# Altium PCB MCXE31B.PcbDoc (part 3 of 3)
Units mil, origin at the board's own origin, x right, y up, seen from the top; angles counter-clockwise.
Board outline 4645.67 x 2165.35 mil, 4 copper layers (TOP, GND, POWER, BOTTOM), stack 60.805 mil thick; 220 components, 156 nets, 796 pads, 319 vias.
Unrouted connection lines stored in the file: 10.
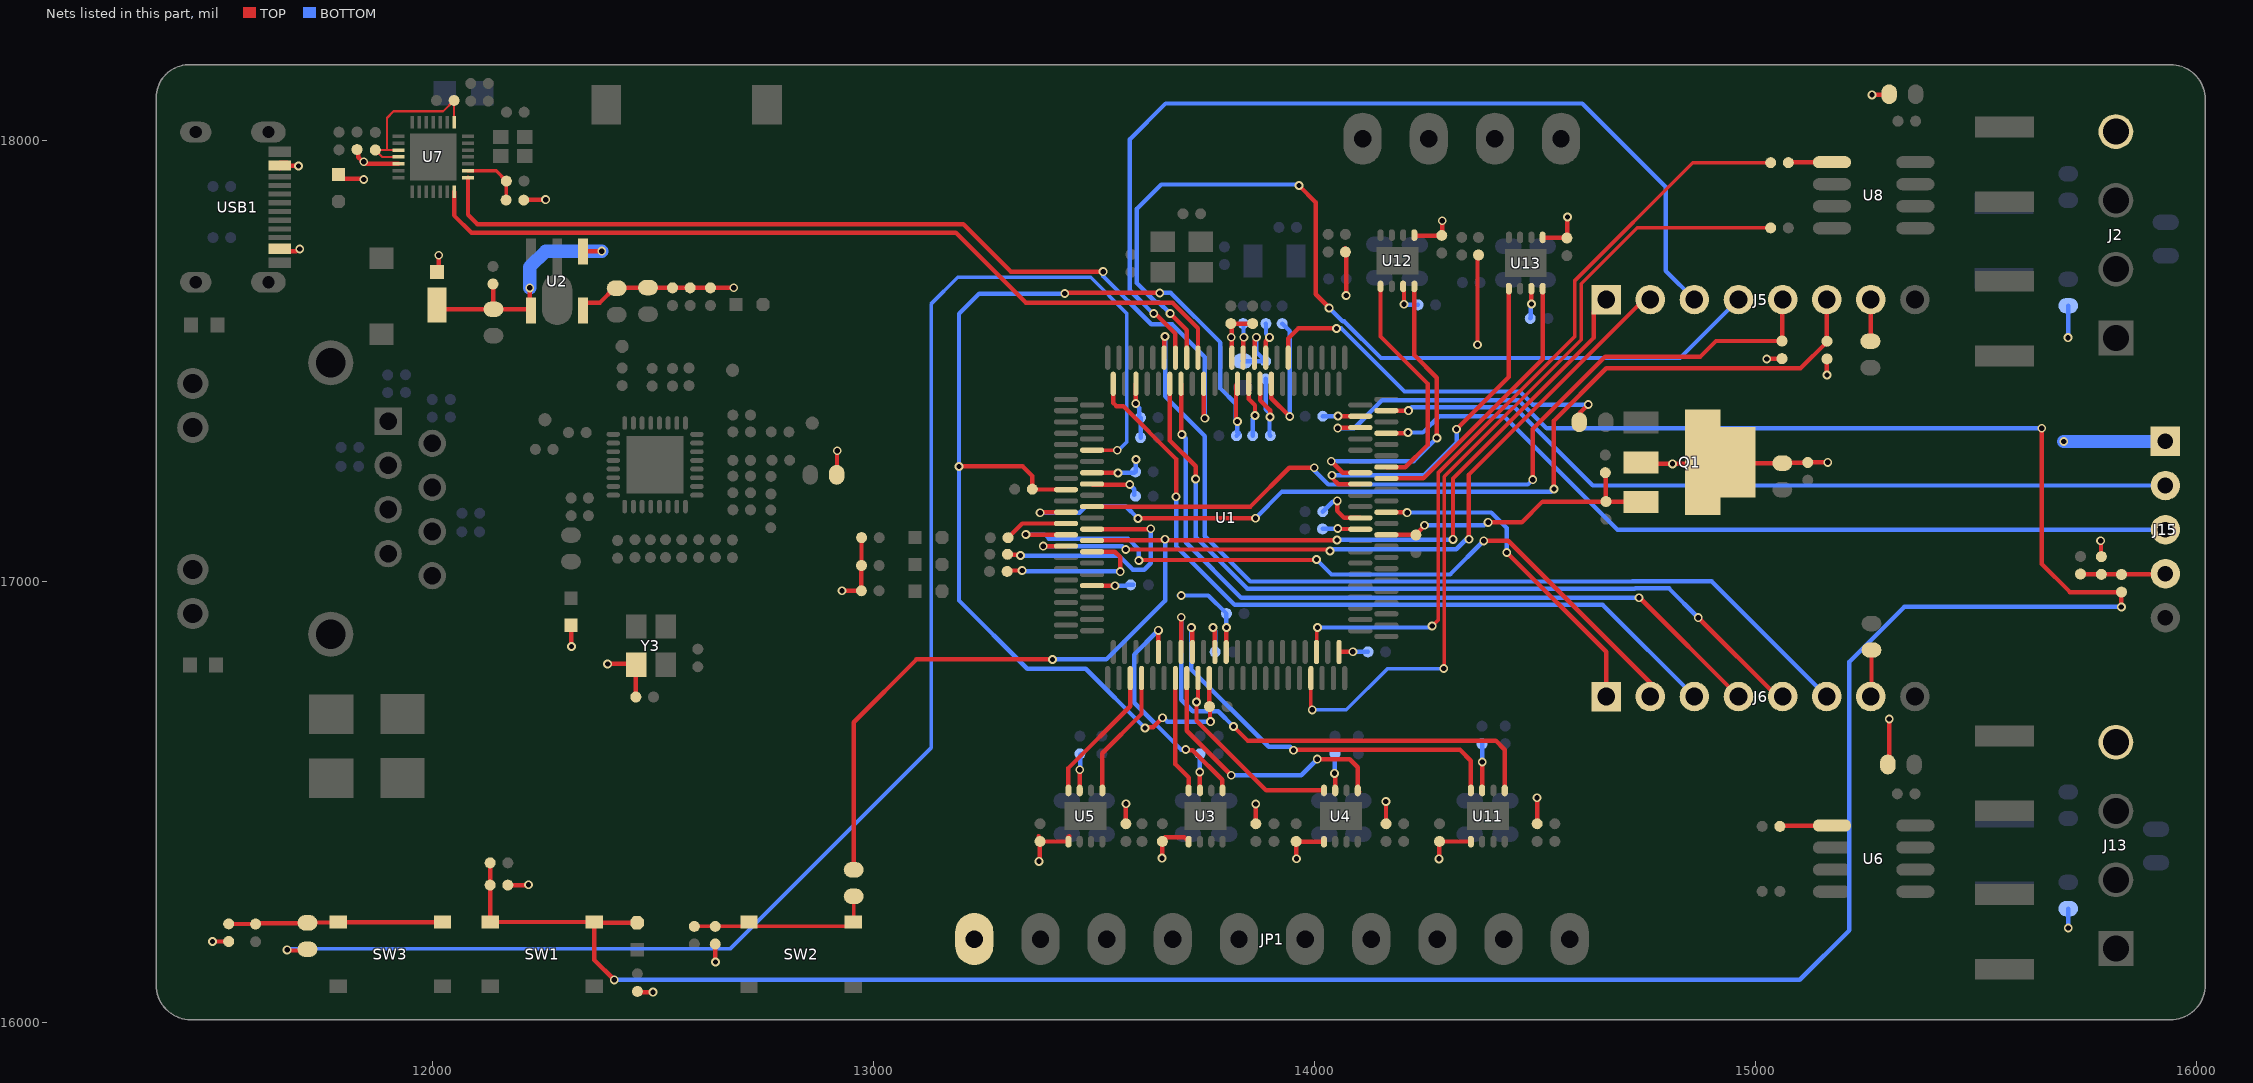
[diagram p5: the nets of this part, all layers, seen from the top]

## Via types
v1: diameter 20, hole 12, TOP to BOTTOM, tented both sides, 319 vias

## Nets (pads, with @x,y where several pads share a name; then routed paths per layer and width w, separated by ;. In a path a pad name is that pad's centre, name@x,y a point inside that pad or via, vN(x,y) a via of type N, cw(c..) or ccw(c..) an arc to the next point about the centre after c; other vN are vias at no path point) (continued)
P3V3: C3.1 C4.1 C15.1 C16.1 C17.1 C18.1 C19.1 C20.1 C21.1 C22.1 C23.1 C24.1 C26.1 C27.1 C33.1 C36.1 C39.1 C44.1 C50.2 C69.1 C72.1 C75.1 C92.1 D4.1 J6.7 J15.1 L3.1 Q1.2 Q1.4 R3.1 R4.2 R6.1 R8.1 R9.2 R10.2 R13.1 R15.2 R16.1 R25.1 R27.1 R35.1 R66.2 R93.1 R99.1 R105.1 R137.1 R138.1 R139.1 R140.1 R145.1 R146.1 R275.1 R281.1 U1.18 U1.38 U1.57 U1.77 U1.108 U1.128 U1.151 U1.169 U2.5 U3.5 U4.5 U5.5 U7.5 U11.5 U12.5 U13.5 Y3.4 | length 4340.5
  TOP w10: v1(11501.9,16184.45) 11501.98,16184.52 11538.48,16184.52 R140.1@11538.55,16184.6 ; D4.1@11787.5,17923.59 11796.88,17914.21 11842.79,17914.21 v1(11844.7,17912.3) ; C50.2@11829.5,17980 11832.37,17977.13 11832.37,17962.49 11839.61,17955.24 11839.61,17952.54 11844.64,17947.51 U7.5@11923.52,17947.51 ; R137.1@12171.3,16312.5 12217,16312.5 v1@12218,16313.5 ; R25.1@12207.5,17865.5 12208,17866 12256.55,17866 v1(12257.05,17866.5) ; L3.1@12314.5,16898.72 12315.02,16898.19 12315.02,16854.03 v1(12315.55,16853.5) ; U2.5@12342.05,17614.9 12342.05,17633.13 12380.38,17633.13 12413.75,17666.5 12488.55,17666.5 C21.1@12489.2,17667.15 12489.45,17666.9 12544.45,17666.9 C3.1@12544.7,17666.65 C26.1@12584.7,17666.65 R3.1@12630.7,17666.65 12630.8,17666.75 12683.6,17666.75 v1(12683.7,17666.85) ; v1(12397.65,16813.95) 12460.56,16813.95 Y3.4@12462.45,16812.06 12461.5,16811.1 C44.1@12461.5,16739 ; R138.1@12465.05,16071.55 12466.83,16069.77 v1(12500.52,16069.77) ; R139.1@12641.6,16178.9 12641.77,16178.73 12641.77,16138.23 v1(12641.95,16138.05) ; R66.2@12916.95,17242.6 12917.6,17243.25 12917.6,17296.5 v1(12918.25,17297.15) ; v1@12928.5,16979.45 v1(12928.85,16979.8) R16.1@12972.95,16979.8 12973.05,16979.9 12973.05,17036.9 R13.1@12973.15,17037 12973.27,17037.12 12973.27,17100.08 R8.1@12973.4,17100.2 ; 13374.44,16423.61 C39.1@13374.67,16423.39 ; v1(13375.8,16366.35) 13376.9,16367.45 13376.9,16410.45 C39.1@13378,16411.55 13378.29,16411.26 13442.03,16411.26 U5.5@13442.32,16410.98 ; U5.5@13442.32,16421.48 U5.5@13444.45,16423.61 ; U1.77@13495.94,16991.46 13496.02,16991.38 13547.67,16991.38 v1(13547.75,16991.3) ; U1.57@13495.94,17247.36 13496.12,17247.18 13553.32,17247.18 v1@13553.5,17247 ; R281.1@13572.6,16451.55 13572.73,16451.67 13572.73,16496.88 v1(13572.85,16497) ; v1(13595,17404.5) 13595.14,17404.64 13595.14,17448.92 U1.38@13595.28,17449.06 ; v1(13654.37,16373.67) 13654.81,16374.11 13654.81,16410.96 13655.4,16411.55 13655.4,16415.52 13661.26,16421.38 13704.72,16421.38 U3.5@13714.97,16411.13 ; U1.108@13800,16840.94 13800.25,16841.19 13800.25,16896.25 v1(13800.5,16896.5) ; U1.18@13851.18,17449.06 13851.18,17414.52 13865.3,17400.4 v1(13865.3,17377.1) ; v1(13866.95,16496.26) 13867.1,16496.12 13867.1,16451.69 R35.1@13867.24,16451.55 ; C36.1@13958.65,16413.2 C36.1@13959.1,16412.75 ; v1(13959.55,16372.4) 13959.1,16372.85 C36.1@13959.1,16412.75 ; U4.5@14021.81,16410.74 U4.5@14021.56,16410.98 13960.87,16410.98 C36.1@13959.1,16412.75 ; v1(14051.9,17183.65) 14051.9,17160.75 14067.65,17145 U1.151@14104.06,17145 ; v1(14053.55,17375.9) 14053.84,17375.6 14103.76,17375.6 U1.169@14104.06,17375.31 ; U1.128@14055.9,16840.94 14056.56,16841.6 v1(14087.15,16841.6) ; R99.1@14070.35,17756.1 14071.9,17754.55 v1(14071.9,17649.05) ; v1(14162,16501.89) 14162.23,16501.66 14162.23,16451.78 R275.1@14162.45,16451.55 ; U12.5@14228.75,17786.86 14228.75,17786.38 14230.5,17784.63 14289.52,17784.63 C72.1@14292.5,17781.65 ; v1(14282.55,16371.95) 14283.02,16372.42 14283.02,16411.08 C69.1@14283.5,16411.55 14283.79,16411.26 14354.44,16411.26 U11.5@14354.73,16410.98 ; C72.1@14288.75,17785.45 14289.75,17786.45 v1(14289.75,17818.7) ; v1(14369.8,17537.45) 14369.8,17735.5 14372,17737.7 R105.1@14372,17741 ; v1(14504.7,16510.65) 14504.85,16510.5 14504.85,16451.7 R93.1@14505,16451.55 ; U13.5@14517.55,17780.91 14518.28,17780.18 14571.62,17780.18 C75.1@14572.35,17779.45 14573.02,17780.12 14573.02,17826.42 v1(14573.7,17827.1) ; Q1.2@14740.5,17271 14744.05,17267.45 v1(14811.85,17267.45) 14876.95,17267.45 Q1.4@14880.5,17271 ; Q1.4@14960.5,17271 14962.4,17269.1 C15.1@15060.95,17269.1 15061.75,17269.9 15117.65,17269.9 C27.1@15118.45,17270.7 15118.6,17270.85 v1(15163.8,17270.85) ; v1(15025.55,17505.1) 15026,17505.55 15059.55,17505.55 R145.1@15060,17506 ; R146.1@15162,17505.5 15162,17469.05 v1(15162.17,17468.88) ; J6.7@15261.5,16740 15263,16741.5 C92.1@15263,16845.5 ; v1(15264.33,18104.08) 15301.58,18104.08 R10.2@15303,18105.5 ; R15.2@15299.75,16586.25 R15.2@15300,16586 15303.4,16589.4 v1(15303.4,16689) ; v1(15782.45,17093.2) 15783.27,17092.38 15783.27,17057.92 R27.1@15784.1,17057.1
  BOTTOM w10: v1(13547.75,16991.3) 13572.75,16991.3 13575.08,16993.63 C18.1@13589.13,16993.63 ; v1@13553.5,17247 v1(13554.5,17247) 13592,17247 C24.1@13594.5,17249.5 13594.98,17249.97 13594.98,17276.97 v1(13595.45,17277.45) ; v1(13595,17404.5) 13595,17401.79 13602.68,17394.11 13602.68,17375.32 C23.1@13605.55,17372.45 13606,17372 C22.1@13606,17326.95 ; v1@13692.75,16968.95 v1(13697.9,16968.95) 13759.55,16968.95 C17.1@13800.5,16928 v1(13800.5,16896.5) ; R6.1@13860.1,17331.35 13860.1,17369.19 13865.3,17374.39 v1(13865.3,17377.1) ; C19.1@14018.9,17159.1 14041.54,17181.74 14049.99,17181.74 v1(14051.9,17183.65) ; C16.1@14019,17375.5 14019.2,17375.7 14053.35,17375.7 v1(14053.55,17375.9) ; v1(14087.15,16841.6) 14121.1,16841.6 C20.1@14121.4,16841.3 ; v1(15708.3,17553.7) 15708.65,17554.05 15708.65,17625.65 R9.2@15709,17626 ; R4.2@15709,16259 15709,16215.25 v1(15709.15,16215.1)
  BOTTOM w30: v1(15698.7,17318.35) J15.1@15929.35,17318.35
  other v1: 12218.2,16313.3 11844.7,17952.54
P5V0: C1.1 C2.1 C34.1 C37.1 C40.1 C70.1 C73.1 C76.1 C93.1 D2.C J2.4 J5.7 J13.4 JP1.10 U2.1 U2.4 U3.3 U4.3 U5.3 U11.3 U12.3 U13.3 | length 1154
  TOP w10: D2.C@12010.2,17627.01 D2.C@12010.89,17627.7 12020.49,17618.1 C1.1@12138.7,17618.1 ; C2.1@12137.55,17675.2 12138.12,17674.62 12138.12,17618.67 C1.1@12138.7,17618.1 ; v1(12221.05,17666.45) U2.4@12221.05,17617.79 ; U2.4@12223.94,17614.9 U2.4@12221.05,17617.79 ; U2.1@12342.05,17748.56 12343.24,17749.75 v1(12384.45,17749.75) ; U5.3@13467.91,16537.63 v1(13467.91,16573.8) ; v1(13740.1,16568.9) 13740.33,16568.67 13740.33,16527.51 U3.3@13741.24,16526.6 ; v1(14045.75,16565.75) 14047.16,16564.35 U4.3@14047.16,16527.12 U4.3@14047.75,16527.72 ; U12.3@14202.88,17670.44 14203.16,17670.72 v1(14203.16,17629.24) ; U11.3@14380.32,16527.12 14380.32,16563.06 14380.41,16563.15 v1(14380.41,16591.57) ; U13.3@14491.96,17664.77 14492.06,17664.68 14492.06,17630.04 v1(14492.15,17629.95) ; C93.1@15260.5,17545.5 15261,17546 15261,17639.5 J5.7@15261.5,17640 ; C1.1@12138.7,17618.1 12220.74,17618.1 U2.4@12221.05,17617.79
  BOTTOM w10: v1(13467.91,16573.8) 13468.91,16574.8 13468.91,16608.46 C40.1@13469.9,16609.45 ; v1(13740.1,16568.9) 13740.33,16569.12 13740.33,16601.17 C34.1@13740.55,16601.4 ; v1(14045.75,16565.75) 14046.2,16566.2 14046.2,16592.95 14046.65,16593.4 ; v1(14203.16,17629.24) 14203.78,17628.62 14234.18,17628.62 C73.1@14234.8,17628 ; C70.1@14379.9,16632.7 14380.15,16632.45 14380.15,16591.83 v1(14380.41,16591.57) ; C76.1@14489.3,17597.2 14490.73,17598.62 14490.73,17628.53 v1(14492.15,17629.95)
  BOTTOM w30: v1(12221.05,17666.45) 12221.05,17713.9 12256.9,17749.75 v1(12384.45,17749.75)
PIN20_V15: C28.1 C29.1 C30.1 C31.1 C32.1 Q1.3 R14.2 U1.20 U1.60 U1.105 U1.148 | length 3389.5
  TOP w10: v1(13194.15,17261.65) 13338.85,17261.65 13360.45,17240.05 C31.1@13360.45,17210.1 13361.22,17209.33 13436.47,17209.33 U1.60@13436.81,17208.98 ; v1(13433.85,17653.55) 13435.34,17655.04 v1(13649.26,17655.04) ; v1(13615.75,16668.65) 13617.66,16670.56 13634.31,16670.56 v1(13655.45,16691.7) ; U1.105@13761.61,16781.81 13761.66,16781.77 13761.66,16718.94 13761.7,16718.9 13761.48,16718.67 13763.33,16716.83 13763.33,16684.33 v1(13764.5,16683.15) ; v1(13825.3,17363.55) 13822.15,17366.7 13822.15,17445.62 U1.20@13825.59,17449.06 ; U1.148@14163.19,17106.61 14163.34,17106.46 C30.1@14229.9,17106.46 ; C30.1@14230.05,17106.3 C30.1@14229.9,17106.46 ; v1(14249.6,17128.2) 14249.6,17127.03 14229.9,17107.32 C30.1@14229.9,17106.46 ; v1(14393.85,17134.8) 14470.1,17134.8 14517.3,17182 C32.1@14661,17182 ; R14.2@14659.5,17247.5 14660.25,17246.75 14660.25,17182.75 C32.1@14661,17182 ; Q1.3@14740.5,17181 14739.5,17182 C32.1@14661,17182
  BOTTOM w10: v1(13433.85,17653.55) 13240.1,17653.55 13194.15,17607.6 v1(13194.15,17261.65) 13194.15,16957.65 13348.7,16803.1 13481.3,16803.1 v1(13615.75,16668.65) ; v1(13649.26,17655.04) 13674.25,17655.04 13786.9,17542.39 13786.9,17438.3 13821.5,17403.7 13821.5,17367.35 v1(13825.3,17363.55) 13825.3,17339.7 13828.5,17336.5 C28.1@13823.35,17331.35 ; v1(13655.45,16691.7) 13658.16,16691.7 13666.71,16683.15 v1(13764.5,16683.15) ; v1(14249.6,17128.2) 14384.54,17128.2 14391.14,17134.8 v1(14393.85,17134.8)
PTA2: R24.2 U1.124 | length 1789.7
  TOP w8: U1.124@14004.72,16840.94 14005.45,16841.67 14005.45,16894.95 v1(14007,16896.5) ; v1(14266.95,16899.85) 14280.25,16913.15 14280.25,17246.79 14590.65,17557.19 14590.65,17683.25 14857.7,17950.3 R24.2@15034.45,17950.3
  BOTTOM w8: v1(14007,16896.5) 14263.6,16896.5 v1(14266.95,16899.85)
PTA3: R23.2 U1.123 | length 1886
  TOP w8: v1@13991.93,16716.27 U1.123@13991.93,16781.81 ; v1(14293.4,16803.45) 14294.25,16804.3 14294.25,17238.75 14604.65,17549.15 14604.65,17675.55 14731.6,17802.5 R23.2@15034.45,17802.5
  BOTTOM w8: v1(13995.2,16709.75) 14072.2,16709.75 14165.9,16803.45 v1(14293.4,16803.45)
PTA4: J15.2 U1.170 | length 1842.8
  TOP w10: U1.170@14163.19,17388.11 v1@14213.08,17388.13
  BOTTOM w10: v1(14213.1,17388.15) 14220.7,17395.75 14453.65,17395.75 14631.05,17218.35 J15.2@15929.35,17218.35
PTA5: C89.1 D13.2 R42.1 R137.2 SW1.3 SW1.4 U1.167 | length 7000.9
  TOP w10: R137.2@12131.3,16312.5 C89.1@12131.3,16362.9 ; R137.2@12131.95,16323.4 12131.95,16229.43 SW1.4@12131.34,16228.83 SW1.3@12367.57,16228.83 ; v1(12412.5,16097.65) 12367.57,16142.58 SW1.3@12367.57,16228.83 ; D13.2@12464.55,16227.14 12369.26,16227.14 SW1.3@12367.57,16228.83 ; v1(14053,17348.5) 14053.87,17349.37 U1.167@14103.71,17349.37 ; v1(15649.05,17348.25) 15649.05,17040.5 15712.8,16976.75 R42.1@15829.7,16976.75 15829.62,16976.67 15829.62,16943.17 v1(15829.55,16943.1)
  BOTTOM w10: v1(12412.5,16097.65) 15100.4,16097.65 15212.95,16210.2 15212.95,16819 15337.05,16943.1 v1(15829.55,16943.1) ; v1(14053,17348.5) 14090.1,17348.5 14153.35,17411.75 14462.85,17411.75 14526.35,17348.25 v1(15649.05,17348.25)
PTA5/RESET_B-MCU-LINK: C55.1 J15.4 R27.2 R42.2 | length 195.6
  TOP w10: C55.1@15736.9,17017.65 15737.17,17017.38 15783.83,17017.38 R27.2@15784.1,17017.1 15784.27,17016.92 15829.52,17016.92 R42.2@15829.7,17016.75 15830.5,17017.55 15928.55,17017.55 J15.4@15929.35,17018.35
  BOTTOM w10: J15.4@15927.83,17016.83 J15.4@15929.35,17018.35
PTA6: U1.102 U11.4 | length 928.1
  TOP w10: v1(13721,16896.5) 13722.88,16894.62 13722.88,16841.29 U1.102@13723.23,16840.94 ; v1(13952.7,16618.35) 13953.4,16619.05 14330.05,16619.05 14354.73,16594.37 U11.4@14354.73,16527.12
  BOTTOM w10: v1(13721,16896.5) 13721,16801.15 13896.3,16625.85 13944.9,16625.85
PTA7: U1.100 U11.1 | length 1143.4
  TOP w10: U1.100@13697.64,16840.94 13697.77,16841.08 13697.77,16919.57 v1(13697.9,16919.7) ; v1@13811.8,16672.65 v1@13816.5,16672.65 ; v1(13816.5,16672) 13848.4,16640.1 14410.85,16640.1 14431.5,16619.45 U11.1@14431.5,16527.12
  BOTTOM w10: v1(13697.9,16919.7) 13697.9,16732.75 13723.9,16706.75 13781.75,16706.75 v1(13816.5,16672)
PTA11: U1.160 U12.1 | length 518.2
  TOP w10: U12.1@14149.9,17669.81 14149.9,17556.3 14256.65,17449.55 14256.65,17310.31 14206.15,17259.81 14163.53,17259.81 U1.160@14163.19,17260.16
PTA12: U1.159 U12.4 | length 703
  TOP w10: v1(14038.15,17273.25) 14064.22,17247.18 14103.88,17247.18 U1.159@14104.06,17247.36 ; U12.4@14226.67,17669.81 14226.67,17513.73 14277.65,17462.75 v1(14277.65,17326.1)
  BOTTOM w10: v1(14038.15,17273.25) 14224.8,17273.25 v1(14277.65,17326.1)
PTA14: J6.1 U1.152 | length 763.5
  TOP w10: U1.152@14163.19,17157.8 14163.53,17157.45 14209.7,17157.45 v1(14210.2,17156.95) ; v1(14436.2,17066.65) 14661.5,16841.35 J6.1@14661.5,16740
  BOTTOM w10: v1(14210.2,17156.95) 14210.45,17157.2 14401.15,17157.2 14436.2,17122.15 v1(14436.2,17066.65)
PTA24: R155.2 U1.14 | length 309.3
  TOP w10: U1.14@13902.36,17449.06 13902.36,17416.39 v1(13944,17374.75)
  BOTTOM w10: R155.2@13927,17585.5 13944,17568.5 v1(13944,17374.75)
PTA25: R156.2 U1.15 | length 84.4
  TOP w10: U1.15@13889.57,17508.19 13889.92,17508.53 13889.92,17545.92 v1(13898.3,17554.3)
  BOTTOM w10: R156.2@13890,17585.5 13890.17,17585.33 13890.17,17562.42 v1(13898.3,17554.3)
PTA28: J6.4 U1.30 | length 1761.9
  TOP w10: U1.30@13697.64,17449.06 13697.64,17335.71 v1(13699.5,17333.85) ; v1(14735.75,16964.1) 14737.4,16964.1 J6.4@14961.5,16740
  BOTTOM w10: v1(13699.5,17333.85) 13708.1,17325.25 13708.1,17089.7 13833.7,16964.1 v1(14735.75,16964.1)
PTA29: J6.5 U1.32 | length 1852.5
  TOP w10: U1.32@13672.02,17449.03 13672.02,17320.53 13730.7,17261.85 v1(13730.7,17233.1) ; v1(14870.35,16918.85) 15049.2,16740 J6.5@15061.5,16740
  BOTTOM w10: v1(13730.7,17233.1) 13730.7,17101.77 13847.72,16984.75 14726.7,16984.75 14727.05,16985.1 14804.1,16985.1 v1(14870.35,16918.85)
PTA30: J6.6 U1.33 | length 2099.5
  TOP w10: U1.33@13659.25,17508.19 13659.6,17508.53 13659.6,17554.3 v1(13661.4,17556.1)
  BOTTOM w10: v1(13661.4,17556.1) 13661.4,17420.6 13751.7,17330.3 13751.7,17103.4 13854.35,17000.75 14720.07,17000.75 14720.42,17001.1 14900.4,17001.1 J6.6@15161.5,16740
PTB18: J6.3 U1.42 | length 1752.5
  TOP w10: U1.42@13544.09,17449.06 13544.09,17405.51 13551.1,17398.5 13566.4,17398.5 13686.3,17278.6 v1(13686.3,17193.1)
  BOTTOM w10: v1(13686.3,17193.1) 13686.3,17080.85 13819.05,16948.1 14653.4,16948.1 J6.3@14861.5,16740
PTB22: R143.2 U1.67 | length 558.2
  TOP w10: R143.2@13304.15,17062.5 13305.58,17061.06 13332.15,17061.06 v1(13333.58,17059.63) ; U1.67@13495.94,17119.41 13496.29,17119.06 13627.71,17119.06 v1(13629.15,17120.5)
  BOTTOM w10: v1(13333.58,17059.63) 13556.22,17059.63 13588.6,17027.25 13614.5,17027.25 13629.15,17041.9 v1(13629.15,17120.5)
PTB23: J5.1 R174.1 U1.69 | length 2800.9
  TOP w10: R174.1@12955.4,16347.1 12955.4,16681.75 13097.75,16824.1 v1(13406.2,16824.1) ; U1.69@13495.94,17093.82 13496.52,17094.4 13661.45,17094.4 14050.75,17094.4 v1(14051.35,17095) ; v1(14314.25,17096.35) 14314.25,17234.3 14633,17553.05 14633,17611.5 J5.1@14661.5,17640
  BOTTOM w10: v1(13406.2,16824.1) 13528.25,16824.1 13661.45,16957.3 v1(13661.45,17096.5) ; v1(14051.35,17095) 14312.9,17095 v1(14314.25,17096.35)
PTB23/WKPU40: C90.1 R139.2 R174.2 SW2.3 SW2.4 | length 428.4
  TOP w8: C90.1@12594.1,16218.9 R139.2@12641.6,16218.9 12953.49,16218.9 12954.42,16219.83 12955.4,16220.82 R174.2@12955.4,16287.1
PTB24: J5.2 U1.70 | length 1755.4
  TOP w10: v1@13384.55,17080.2 v1(13385.37,17081.02) U1.70@13436.81,17081.02 ; v1(13572.4,17073.4) 14029.25,17073.4 14032.84,17069.8 v1(14035.55,17069.8) ; v1(14350.35,17096.75) 14350.35,17243.2 14747.15,17640 J5.2@14761.5,17640
  BOTTOM w10: v1(13385.37,17081.02) 13564.78,17081.02 v1(13572.4,17073.4) ; v1(14035.55,17069.8) 14039.75,17074 14321.6,17074 14344.35,17096.75 v1(14350.35,17096.75)
PTC4: J15.3 U1.166 | length 1888.7
  TOP w10: U1.166@14163.19,17336.93 14163.53,17337.28 14211.08,17337.28 v1(14212.35,17338.55)
  BOTTOM w10: v1(14212.35,17338.55) 14245.95,17338.55 14282.95,17375.55 14430,17375.55 14687.2,17118.35 J15.3@15929.35,17118.35
PTC14: R144.2 U1.71 | length 359.9
  TOP w10: R144.2@13303.4,17023.75 13305.4,17025.75 v1(13337.4,17025.75) ; U1.71@13495.94,17068.23 13547.62,17068.23 13559.65,17056.2 v1(13559.65,17023.15)
  BOTTOM w10: v1(13337.4,17025.75) 13338.7,17024.45 13558.35,17024.45 v1(13559.65,17023.15)
PTC15: J6.2 U1.68 | length 1763.5
  TOP w10: v1(13345.85,17107.15) 13346.12,17106.88 13436.54,17106.88 U1.68@13436.81,17106.61 ; v1(13601.95,17048.25) 13603.25,17049.55 14003.25,17049.55 v1(14004.55,17050.85) ; v1(14383.85,17092.95) 14439.6,17092.95 14769.15,16763.4 14769.15,16747.65 J6.2@14761.5,16740
  BOTTOM w10: v1(13345.85,17107.15) 13388.94,17107.15 13398.02,17098.06 13577.44,17098.06 13601.95,17073.55 v1(13601.95,17048.25) ; v1(14004.55,17050.85) 14038.65,17016.75 14307.65,17016.75 v1(14383.85,17092.95)
PTC16: R141.2 U1.66 | length 144.8
  TOP w10: R141.2@13305.35,17100.05 13337.5,17132.2 U1.66@13436.81,17132.2
PTC26: U1.91 U5.4 | length 302.2
  TOP w10: U5.4@13442.32,16537.63 13442.32,16577.91 13582.48,16718.07 U1.91@13582.48,16781.81
PTC27: U1.93 U5.1 | length 281
  TOP w10: U5.1@13519.09,16537.63 13519.09,16611.39 13608.07,16700.37 U1.93@13608.07,16781.81
PTC28: U1.96 U3.1 | length 532.1
  TOP w10: v1(13646.2,16890) 13646.33,16889.87 13646.33,16841.08 U1.96@13646.46,16840.94 ; v1(13708.2,16619.7) 13710.11,16617.79 13724.44,16617.79 13791.02,16551.21 13791.02,16528 U3.1@13791.74,16527.28
  BOTTOM w10: v1(13646.2,16890) 13591.35,16835.15 13591.35,16726.1 13697.75,16619.7 v1(13708.2,16619.7)
PTC29: U1.99 U3.4 | length 267
  TOP w10: U1.99@13684.84,16781.81 13684.84,16586.41 13714.97,16556.28 U3.4@13714.97,16527.28
PTC30: U1.101 U4.1 | length 628.5
  TOP w10: U1.101@13710.43,16781.81 13710.43,16662.52 v1(13811.3,16561.65) ; v1(14006.5,16598.05) 14079.85,16598.05 14098.34,16579.56 U4.1@14098.34,16527.12 14101.2,16524.26 U4.1@14101.4,16524.46
  BOTTOM w10: v1(13811.3,16561.65) 13970.1,16561.65 v1(14006.5,16598.05)
PTC31: U1.103 U4.4 | length 452.4
  TOP w10: U1.103@13736.02,16781.81 13736.02,16733.88 13732.6,16730.46 v1(13732.6,16727.75) 13732.6,16685.35 13890.83,16527.12 U4.4@14021.56,16527.12
PTD5: R218.1 U1.53 | length 3573.1
  TOP w8: v1(11671.05,16165.65) 11672.48,16164.22 11714.27,16164.22 R218.1@11717.05,16167 ; U1.53@13507.49,17299 13507.98,17298.5 v1(13553.08,17298.5)
  BOTTOM w8: v1(11671.05,16165.65) 11674.05,16168.65 12676.15,16168.65 13130.9,16623.4 13130.9,17629.89 13191.55,17690.54 13492.55,17690.54 13575,17608.09 13575,17317.72 13555.78,17298.5 v1(13553.08,17298.5)
PTD5/EIRQ13: C88.1 R140.2 R218.2 SW3.3 SW3.4 | length 486.6
  TOP w10: R140.2@11538.55,16224.6 11538.8,16224.35 11599.3,16224.35 C88.1@11599.55,16224.1 11601,16225.55 11715.6,16225.55 R218.2@11717.05,16227 11717.67,16227.61 11786.38,16227.61 11787,16228.23 SW3.3@12023.22,16228.23
PTD8: J5.6 R146.2 U1.64 | length 2213.4
  TOP w10: v1(13378.15,17156.75) 13378.85,17157.45 13436.47,17157.45 U1.64@13436.81,17157.8 ; v1(13599.85,17143.7) 13600.13,17143.98 13865.93,17143.98 v1(13866.21,17144.26) ; v1(14543,17210.35) 14543,17365.4 14661.7,17484.1 15102.1,17484.1 15162,17544 R146.2@15162,17545.5 15161.75,17545.75 15161.75,17639.75 J5.6@15161.5,17640
  BOTTOM w10: v1(13378.15,17156.75) 13467.45,17156.75 13482.15,17171.45 13572.1,17171.45 v1(13599.85,17143.7) ; v1(13866.21,17144.26) 13926.6,17204.65 14537.3,17204.65 v1(14543,17210.35)
PTD9: J5.5 R145.2 U1.63 | length 1916.8
  TOP w10: U1.63@13495.98,17170.62 13855.02,17170.62 13943.25,17258.85 v1(13999.45,17258.85) ; v1(14495.1,17231.7) 14495.1,17346.6 14659.3,17510.8 14875.2,17510.8 14910.4,17546 R145.2@15060,17546 15060.75,17546.75 15060.75,17639.25 J5.5@15061.5,17640
  BOTTOM w10: v1(13999.45,17258.85) 13999.45,17252.55 14031.35,17220.65 14484.05,17220.65 v1(14495.1,17231.7)
PTD17: J5.3 U1.31 | length 2149.3
  TOP w10: v1@13637.26,17610.01 13684.84,17562.42 U1.31@13684.84,17508.19
  BOTTOM w10: v1(13635.6,17608.35) 13634.12,17608.35 13581.15,17661.32 13581.15,18003.1 13662.51,18084.46 14607.34,18084.46 14796.55,17895.25 14796.55,17704.95 J5.3@14861.5,17640
PTE3: U1.27 U7.14 | length 1913
  TOP w10: U7.14@12049.5,17884.52 12049.5,17830.75 12089.05,17791.2 13187.25,17791.2 13345.9,17632.55 13678.45,17632.55 13736.02,17574.98 U1.27@13736.02,17508.19
PTE12: J5.4 U1.29 | length 2117.8
  TOP w10: v1@13672.92,17611.08 v1@13674.3,17609.7 ; v1(13672.95,17608.35) 13710.43,17570.87 U1.29@13710.43,17508.19 ; v1(13964.9,17898.65) 14003.3,17860.25 14003.3,17651.8 14033.4,17621.7 v1(14033.4,17620.85)
  BOTTOM w10: v1(13672.95,17608.35) 13647.26,17634.04 13640.56,17634.04 13597.15,17677.45 13597.15,17845.42 13652.49,17900.76 13962.79,17900.76 v1(13964.9,17898.65) ; v1(14033.4,17620.85) 14033.65,17620.85 14064,17590.5 14067.85,17590.5 14150.95,17507.4 14828.9,17507.4 J5.4@14961.5,17640
PTE13: R12.1 U1.11 | length 852.9
  TOP w10: U1.11@13940.75,17508.19 13940.75,17551.8 13963.45,17574.5 v1(14050.3,17574.5) ; R12.1@14600.5,17362 14603.12,17364.62 14603.12,17384.27 v1(14620.8,17401.95)
  BOTTOM w10: v1(14050.3,17574.5) 14061.22,17574.5 14204.27,17431.45 14465.78,17431.45 14495.28,17401.95 v1(14620.8,17401.95)
PTE14: U1.26 U7.15 | length 2112.1
  TOP w10: U7.15@12081,17916.02 12081,17832.4 12102.25,17811.15 13203.9,17811.15 13311.7,17703.35 v1(13520.95,17703.35) ; U1.26@13748.82,17449.06 13748.82,17373.68 v1(13751.65,17370.85)
  BOTTOM w10: v1(13520.95,17703.35) 13520.95,17693.3 13630.2,17584.05 13677.3,17584.05 13751.65,17509.7 v1(13751.65,17370.85)
PTE24: U1.157 U13.1 | length 787.7
  TOP w10: v1(14040.05,17241.65) 14040.05,17235.3 14053.92,17221.42 14103.71,17221.42 U1.157@14104.06,17221.77 ; v1(14322.35,17346.05) 14440.78,17464.48 U13.1@14440.78,17664.77
  BOTTOM w10: v1(14040.05,17241.65) 14248.85,17241.65 14322.35,17315.15 v1(14322.35,17346.05)
PTE25: U1.158 U13.4 | length 626
  TOP w10: U1.158@14163.19,17234.57 14246.82,17234.57 14517.55,17505.3 U13.4@14517.55,17664.77
RST: C49.2 R25.2 U7.16 | length 139.6
  TOP w8: U7.16@12081,17931.76 12144.74,17931.76 12167.75,17908.75 12167.75,17865.75 R25.2@12167.5,17865.5
RXD_485: R290.1 U6.1 | length 119.1
  TOP w10: R290.1@15055.2,16445.7 15056.1,16446.6 15172.61,16446.6 U6.1@15173.51,16447.5
RXD_485_1: R24.1 U8.1 | length 102.5
  TOP w8: U8.1@15173.51,17951.5 U8.1@15175.58,17953.57
  TOP w10: R24.1@15074.45,17950.3 15075.05,17950.9 15172.91,17950.9 U8.1@15173.51,17951.5
V11_MCU: C10.1 C11.1 C12.1 C13.1 C14.1 U1.21 U1.59 U1.106 U1.149 | length 434.4
  TOP w10: U1.59@13495.94,17221.77 13497.22,17220.5 v1(13581.5,17220.5) ; U1.106@13774.41,16840.94 v1@13774.41,16889.38 ; U1.21@13812.8,17508.19 13812.45,17508.53 13812.45,17554.6 13812.45,17583.55 C12.1@13810.5,17585.5 C14.1@13860,17585.5 ; v1(14053,17121) 14054.24,17119.76 14103.71,17119.76 U1.149@14104.06,17119.41
  BOTTOM w10: v1(13581.5,17220.5) 13591.79,17210.21 C10.1@13591.79,17196.86 ; v1(13770,16896.5) 13770,16893.79 13775,16888.79 C13.1@13775,16841 ; C11.1@14018.45,17120.05 14018.92,17120.53 14052.52,17120.53 v1(14053,17121)
  other v1: 13811.65,17554.6
V25_MCU: C9.1 U1.19 | length 78.7
  TOP w10: U1.19@13838.39,17508.19 13838.74,17508.53 13838.74,17553.24 v1(13840.1,17554.6)
  BOTTOM w10: C9.1@13838.5,17585.5 13839.3,17584.7 13839.3,17555.4 v1(13840.1,17554.6)
VBUS: D2.A USB1.A4 USB1.A9 USB1.B4 USB1.B9 | length 160
  TOP w10: USB1.B4@11653.99,17760.89 USB1.A9@11653.99,17749.07 11654.9,17749.98 11691.87,17749.98 11696.69,17754.8 v1(11699.4,17754.8) ; USB1.B9@11654,17938.05 USB1.A4@11654,17949.86 11670.69,17949.86 11671.6,17948.95 11671.6,17943 v1(11696.6,17943) ; D2.A@12010.89,17702.5 12014.85,17706.46 v1(12014.85,17740.5)
VDD: C43.2 C45.1 U7.3 U7.4 U7.22 | length 402.5
  TOP w5: U7.4@11923.52,17963.3 11886.7,17963.3 C43.2@11871,17979 11897.26,17979 ; U7.3@11923.52,17979 11897.26,17979 ; U7.22@12049.5,18042 C45.1@12049.5,18091.5 12024.7,18066.7 11912.15,18066.7 11897.26,18051.81 11897.26,17979
VREFH_MCU: C25.1 R6.2 U1.16 | length 219.5
  TOP w10: U1.16@13876.77,17449.06 13876.77,17411.56 13899.45,17388.88 v1(13899.45,17373.8)
  BOTTOM w10: C25.1@13889.5,17460 13889.5,17390.9 13897.54,17382.86 13897.54,17375.71 v1@13898.15,17375.1 ; v1(13899.45,17373.8) v1@13898.15,17375.1 ; R6.2@13900.1,17331.35 13898.15,17333.3 v1@13898.15,17375.1
VREFL: C25.2 R11.2 U1.17 | length 163.1
  TOP w10: U1.17@13863.98,17508.19 13864.33,17508.53 13864.33,17547.72 13868.35,17551.74 v1(13868.35,17554.45)
  BOTTOM w10: R11.2@13837.5,17500.5 13837.75,17500.25 C25.2@13889.25,17500.25 ; v1(13868.35,17554.45) 13868.35,17521.15 C25.2@13889.25,17500.25 ; C25.2@13889.5,17500 C25.2@13889.25,17500.25
pads on no net: ANT1.2 J1.7 U1.1 U1.2 U1.3 U1.4 U1.5 U1.6 U1.7 U1.8 U1.9 U1.10 U1.12 U1.13 U1.28 U1.34 U1.35 U1.36 U1.39 U1.40 U1.41 U1.43 U1.44 U1.45 U1.46 U1.52 U1.56 U1.72 U1.73 U1.74 U1.75 U1.76 U1.79 U1.80 U1.81 U1.82 U1.83 U1.84 U1.85 U1.86 U1.87 U1.88 U1.89 U1.90 U1.92 U1.94 U1.95 U1.97 U1.98 U1.104 U1.109 U1.110 U1.111 U1.112 U1.113 U1.114 U1.115 U1.116 U1.117 U1.118 U1.119 U1.122 U1.125 U1.126 U1.129 U1.130 U1.131 U1.132 U1.133 U1.135 U1.136 U1.137 U1.138 U1.139 U1.140 U1.141 U1.142 U1.143 U1.144 U1.145 U1.146 U1.147 U1.153 U1.154 U1.155 U1.156 U1.161 U1.162 U1.163 U1.164 U1.165 U1.171 U2.3 U7.1 U7.2 U7.7 U7.9 U7.10 U7.11 U7.17 U7.23 U7.24 U7.25 U7.26 U7.27 U7.28 U10.4 USB1.A8 USB1.B8

## Polygon pours and split planes (outlines as drawn)
DGND on GND (split plane): 15952.68,18151.4 15998.46,18105.63 15999.63,18099.71 15999.63,18093.94 15999.63,16086.06 15999.63,16080.29 15997.38,16068.96 15993.28,16059.07 15967.98,16033.77 15958.09,16029.67 15946.76,16027.42 11447.02,16027.42 11435.69,16029.67 11428.12,16032.81 11399.55,16061.38 11396.41,16068.96 11394.16,16080.29 11394.16,16086.06 11394.16,18097.24 11394.16,18102.55 11395.97,18111.95 11434.68,18150.65 11441.88,18152.37 11446.75,18152.58 15946.76,18152.58
GND_E on GND (split plane): 11827.05,17401.71 11738.2,17312.85 11737.09,17311.2 11736.7,17309.25 11736.7,17118.05 11737.09,17116.1 11738.2,17114.45 11803.15,17049.5 11804.8,17048.39 11806.75,17048 12062.4,17048 12062.4,16781.55 11670.82,16781.55 11670.85,16781.7 11670.85,17551.75 11827.05,17551.75
P3V3 on POWER (split plane): 15958.09,18150.33 15968.77,18145.91 15978.37,18139.49 15986.54,18131.32 15992.96,18121.71 15997.38,18111.04 15999.63,18099.71 15999.63,18093.94 15999.63,16086.06 15999.63,16080.29 15997.38,16068.96 15992.96,16058.28 15986.54,16048.68 15978.37,16040.51 15968.77,16034.09 15958.09,16029.67 15946.76,16027.42 11447.02,16027.42 11435.69,16029.67 11425.02,16034.09 11415.42,16040.51 11407.25,16048.68 11400.83,16058.29 11396.41,16068.96 11394.16,16080.29 11394.16,16086.06 11394.16,18097.24 11394.16,18102.55 11396.17,18112.97 11400.13,18122.82 11405.88,18131.74 11413.22,18139.4 11421.89,18145.54 11431.56,18149.91 11441.88,18152.37 11446.75,18152.58 15946.76,18152.58
VBUS on POWER (split plane): 11750,18053.24 11750,17858.45 11750.39,17856.5 11751.5,17854.85 11820.05,17786.3 11821.7,17785.19 11823.65,17784.8 12037.14,17784.8 12076.35,17745.59 12076.35,17679.96 12021.84,17625.45 11588.16,17625.45 11551.85,17661.76 11551.85,18049.49 11585.46,18083.1 11720.14,18083.1
EPHY_VDDA on POWER (split plane): 12427.75,17388.29 12427.75,16964.41 12365.39,16902.05 11881.86,16902.05 11733.85,17050.06 11733.85,17389.69 11834.36,17490.2 12325.84,17490.2
PIN20_V15 on POWER (split plane): 14267.9,16825.76 14097.74,16655.6 13718.85,16655.6 13718.85,16709.05 14055.8,16709.05 14057.75,16709.44 14059.4,16710.55 14203.05,16854.2 14204.16,16855.85 14204.55,16857.8 14204.55,17188.65 14267.9,17188.65
P5V0 on POWER (split plane): 15970.05,16541.65 13308.15,16541.65 13306.2,16541.26 13304.55,16540.15 13303.44,16538.5 13303.05,16536.55 13303.05,16125.65 13147.5,16125.65 13147.5,16477 13147.5,16636.7 15284.15,16636.7 15286.1,16637.09 15287.75,16638.2 15297.55,16647.99 15732.24,16647.99 15734.19,16648.38 15735.84,16649.48 15812.4,16726.05 15813.51,16727.7 15813.9,16729.65 15813.9,17580 15813.51,17581.95 15812.4,17583.6 15810.75,17584.71 15808.8,17585.1 14221.01,17585.1 14101.4,17704.7 14099.75,17705.81 14097.8,17706.2 13996.65,17706.2 13994.7,17705.81 13993.48,17705 12310.5,17705 12310.5,17785.75 15704.85,17785.75 15706.8,17786.14 15708.45,17787.25 15709.56,17788.9 15709.95,17790.85 15709.95,18091.5 15970.05,18091.5
EPHY_VDDIO on POWER (split plane): 12885.35,17449.69 12885.35,17093.31 12822.24,17030.2 12558.86,17030.2 12523.2,17065.86 12523.2,17546.25 12788.79,17546.25
V11_MCU on POWER (split plane): 13828.35,17211.5 13828.74,17209.55 13829.85,17207.9 13881.55,17156.2 13883.2,17155.09 13885.15,17154.7 14086.45,17154.7 14086.45,17054.4 13872.4,17054.4 13870.45,17054.01 13868.8,17052.9 13810.1,16994.2 13808.99,16992.55 13808.6,16990.6 13808.6,16865.26 13794.99,16851.65 13748.01,16851.65 13738.65,16861.01 13738.65,17130.05 13738.26,17132 13737.15,17133.65 13735.5,17134.76 13733.55,17135.15 13487.45,17135.15 13487.45,17249.2 13697.45,17249.2 13699.4,17249.59 13701.05,17250.7 13702.16,17252.35 13702.55,17254.3 13702.55,17600.65 13828.35,17600.65

## Keep-outs
Keep-Out Layer:
  region: 12291.2,17931.25 12291.2,18171.25 12911.2,18171.25 12911.2,17931.25 12291.2,17931.25

## Other copper
GND (plane layer: these items are gaps in the copper):
  lines w10: 11411.85,18163.05 15948.24,18163.05 16020,18091.29 16020,16078.58 15949.42,16008 11445.72,16008 11374.06,16079.66 11374.06,18097.24 11446.32,18169.51 ; 11832.15,17556.05 11832.15,17399.6 11741.8,17309.25 11741.8,17118.05 11806.75,17053.1 12067.5,17053.1 12067.5,16776.45 11660.5,16776.45 11665.75,16781.7 11665.75,17556.85 11836.45,17556.85
POWER (plane layer: these items are gaps in the copper):
  lines w10: 12669.85,17618.75 12669.95,17618.65 ; 13996.65,17701.1 14097.8,17701.1 14218.9,17580 15808.8,17580 15808.8,16729.65 15732.24,16653.09 15295.44,16653.09 15284.15,16641.8 13142.4,16641.8 13142.4,16477 13142.4,16120.55 13308.15,16120.55 13308.15,16536.55 15975.15,16536.55 15975.15,18096.6 15704.85,18096.6 15704.85,17790.85 12305.4,17790.85 12305.4,17699.9 14012.8,17699.9 ; 11546.75,17659.65 11546.75,18051.6 11583.35,18088.2 11722.25,18088.2 11755.1,18055.35 11755.1,17858.45 11823.65,17789.9 12039.25,17789.9 12081.45,17747.7 12081.45,17677.85 12023.95,17620.35 11586.05,17620.35 11546.75,17659.65 ; 11728.75,17047.95 11728.75,17391.8 11832.25,17495.3 12327.95,17495.3 12432.85,17390.4 12432.85,16962.3 12367.5,16896.95 11879.75,16896.95 11728.75,17047.95 ; 12518.1,17063.75 12518.1,17551.35 12790.9,17551.35 12890.45,17451.8 12890.45,17091.2 12824.35,17025.1 12556.75,17025.1 12518.1,17063.75 ; 13482.35,17130.05 13482.35,17254.3 13697.45,17254.3 13697.45,17605.75 13833.45,17605.75 13833.45,17211.5 13885.15,17159.8 14091.55,17159.8 14091.55,17049.3 13872.4,17049.3 13813.7,16990.6 13813.7,16863.15 13797.1,16846.55 13745.9,16846.55 13733.55,16858.9 13733.55,17130.05 13482.35,17130.05 ; 13713.75,16650.5 13713.75,16714.15 14055.8,16714.15 14199.45,16857.8 14199.45,17193.75 14273,17193.75 14273,16823.65 14099.85,16650.5 13713.75,16650.5

## Silkscreen, mask and mechanical layers (free items; w line width, h text height)
Top Overlay:
  text "CAN2" at 13863.05,18129.45 h30 r270
  text "CAN1" at 13725.45,18128.35 h30 r270
  text "L" at 13826.55,18066.1 h30
  text "L" at 13959,18065.15 h30
  text "H" at 13785.85,18061.05 h30
  text "H" at 13914.05,18061.05 h30
  text "USB2UART5" at 11867.5,17829.5 h30
  text "GND" at 15318.15,17708.95 h30
  text "5V" at 15235.8,17707.95 h30
  text "SCL" at 15027.35,17707.1 h30
  text "SDA" at 15124.3,17707.1 h30
  text "RX" at 14837.35,17698.1 h30
  text "TX" at 14931.75,17698.1 h30
  text "I2C1" at 15065.15,17563.3 h30
  text "UART2" at 14842.1,17557.05 h30
  text "INT" at 14725,17552.25 h30
  text "PWM" at 14614.5,17535.8 h30
  text "5V" at 15395,17532.25 h30
  text "B" at 15411,17483.75 h30
  text "A" at 15410.5,17434.25 h30
  text "GND" at 15371,17390.25 h30
  text "3V3" at 15727,17327.1 h30
  text "SWDIO" at 15727.3,17288.5 h30
  text "SWCLK" at 15725.95,17246.15 h30
  text "RST" at 15726.6,17204.9 h30
  text "GND" at 15725.3,17164.25 h30
  text "PTC16" at 12769.75,16908.55 h30
  text "PTB22" at 12769.75,16867.5 h30
  text "PTC14" at 12769.75,16824.45 h30
  text "SPI1" at 14962.9,16796.2 h30
  text "CS" at 14842.65,16642.65 h30
  text "SCK" at 14927.35,16642.7 h30
  text "MOSI" at 15116.6,16643.05 h30
  text "3V3" at 15223.4,16642.7 h30
  text "GND" at 15323.9,16640.3 h30
  text "RST" at 14733.75,16638.5 h30
  text "ADC" at 14628.95,16633 h30
  text "MISO" at 15009.65,16600.75 h30
  text "PTA5/RST" at 12275,16290.35 h30
  text "Wakeup" at 12753.25,16287.15 h30
  text "PTD5/EIRQ13" at 11656.2,16283.15 h30
  text "5V" at 15401.6,16188 h30
  text "GND" at 15228.35,16160.25 h30 r270
  text "5V" at 14703,16159.4 h30 r270
  text "B" at 15417.6,16139.5 h30
  text "L" at 14989.85,16126.1 h30 r180
  text "H" at 15039.55,16126.1 h30 r180
  text "H" at 14927.2,16125.25 h30 r180
  text "L" at 15113.9,16125.25 h30 r180
  text "H" at 15152.85,16125.25 h30 r180
  text "L" at 14876.95,16123.85 h30 r180
  text "H" at 14811.3,16121.9 h30 r180
  text "L" at 14761.05,16120.5 h30 r180
  text "A" at 15417.1,16090 h30
  text "CAN5" at 14852.8,16051.7 h30 r90
  text "CAN3" at 14963.3,16051 h30 r90
  text "CAN4" at 15086.35,16051.25 h30 r90
  text "CAN0" at 15206.85,16049 h30 r90
  text "GND" at 15377.6,16046 h30
  text "RS485 UART3" at 15653,16042 h30
CUTOUT:
  lines w0.98: 11374.06,16086.06 ccw(c11448.92,16082.14) 11445,16007.28 ; 11374.06,18097.24 cw(c11447.91,18098.83) 11446.32,18172.68 ; 15947.5,18172.68 cw(c15944.24,18097.19) 16019.73,18093.94 ; 15949,16007.28 ccw(c15944.97,16082.04) 16019.73,16086.06
  lines w1: 11374.06,16086.06 11374.06,18097.24 ; 11445,16007.28 15949,16007.28 ; 11446.32,18172.68 15947.5,18172.68 ; 16019.73,16086.06 16019.73,18093.94
D_SIZE_PG1:
  drawing of 2155 lines, arcs and shapes, not listed
  text "170-90818" at 25920.5,9029 h175
  text "THIS DOCUMENT CONTAINS INFORMATION" at 25475.5,8824 h63
  text "___ COMPANY PUBLIC" at 22630.5,8789 h63
  text "NXP SEMICONDUCTORS" at 28662.5,8744 h225
  text "PROPRIETARY TO NXP AND SHALL NOT" at 25475.5,8699 h63
  text "BE USED FOR ENGINEERING DESIGN" at 25475.5,8574 h63
  text "___ COMPANY INTERNAL" at 22630.5,8489 h63
  text "X" at 22670.5,8489 h100
  text "PROCUREMENT OR MANUFACTURE IN WHOLE" at 25475.5,8449 h63
  text "OR IN PART WITHOUT THE CONSENT OF" at 25475.5,8324 h63
  text "NXP." at 25475.5,8199 h63
  text "___ COMPANY CONFIDENTIAL" at 22630.5,8189 h63
  text "6501 WILLIAM CANNON DRIVE WEST  AUSTIN, TEXAS 78735 USA" at 28065.5,8144 h94
  text "ALL PARTS, MATERIALS AND FINISHED" at 20202.5,7872 h63
  text "ASSEMBLY SHALL MEET THE RoHS" at 20202.5,7788 h63
  text "PRINTED WIRING BOARD" at 29211.5,7761 h175
  text "COMMISSION DELEGATED DIRECTIVE (EU)" at 20202.5,7704 h63
  text "2015/863 OF 31 MARCH  2015 AMENDING" at 20202.5,7620 h63
  text "Aison Zhou" at 25479.5,7556 h100
  text "03-28-24" at 27125.5,7556 h100
  text "ANNEX II TO DIRECTIVE 2011/65/EU. A" at 20202.5,7536 h63
  text "CERTIFICATE OF COMPLIANCE IS" at 20202.5,7452 h63
  text "FRDM-MCXN947" at 29768.5,7395 h175
  text "REQUIRED UPON REQUEST." at 20202.5,7368 h63
  text "Steven Ding" at 25479.5,7136 h100
  text "03-28-24" at 27120.5,7136 h100
  text "ALL PARTS, MATERIALS AND FINISHED" at 20178.5,6913 h63
  text "ASSEMBLY SHALL NOT CONTAIN ANY OF" at 20178.5,6829 h63
  text "LAY-90818" at 28447.5,6825 h125
  text "FAB-90818" at 30416.5,6800 h175
  text "THE SUBSTANCES OF VERY HIGH CONCERN" at 20178.5,6745 h63
  text "Kate Fan" at 25479.5,6741 h100
  text "03-28-24" at 27115.5,6741 h100
  text "C" at 32890.5,6724 h175
  text "(SVHC) ABOVE THE THRESHOLD VALUE PER" at 20178.5,6661 h63
  text "THE CURRENT ECHA LIST OF SVHC'S AND" at 20178.5,6577 h63
  text "WITH ANNEX XIV AND ANNEX XVII OF REACH" at 20178.5,6498 h63
  text "DIRECTIVE 76/769/EEC. A CERTIFICATE OF" at 20178.5,6414 h63
  text "COMPLIANCE IS REQUIRED UPON REQUEST." at 20178.5,6330 h63
TITLE_DATA_PAGE_2:
  text "3" at 32900.5,6324 h125
  text "2" at 32050.5,6314 h125
  text "1/1" at 28535.5,6309 h125
TITLE_DATA_PAGE_3:
  lines w6: 1285.5,10084 1495.5,10379 1675.5,10084 1285.5,10084
  text "24." at 1375.5,10104 h125
  text "3" at 32900.5,6324 h125
  text "1/1" at 28535.5,6309 h125
  text "3" at 32050.5,6309 h125
BACKDRILL_INFO:
  lines w1: 1409.5,8876 9009.5,8876 ; 1417.5,7533 9017.5,7533 ; 1417.5,7983 9017.5,7983 ; 1417.5,8433 9017.5,8433 ; 4234.5,7026 4234.5,9326 ; 6559.5,7026 6559.5,9326 ; 1409.5,7014 1409.5,9326 9009.5,9326 9009.5,7014 1409.5,7014
  text "MUST NOT CUT LAYER" at 6734.5,9126 h125
  text "BACK DRILL REFERENCE" at 1584.5,9101 h125
  text "MUST CUT LAYER" at 4509.5,9101 h125
  text "TOP TO LAYER X" at 1577.5,8578 h125
  text "LAYER X" at 4477.5,8578 h125
  text "LAYER X+1" at 6727.5,8578 h125
  text "TOP TO LAYER X" at 1592.5,8133 h125
  text "LAYER X" at 4492.5,8133 h125
  text "LAYER X+1" at 6742.5,8133 h125
  text "BOTTOM TO LAYER X" at 1614.5,7691 h125
  text "LAYER X" at 4514.5,7691 h125
  text "LAYER X-1" at 6764.5,7691 h125
  text "BOTTOM TO LAYER X" at 1609.5,7206 h125
  text "LAYER X" at 4509.5,7206 h125
  text "LAYER X-1" at 6759.5,7206 h125
TITLE_DATA:
  text "1" at 32900.5,6324 h125
  text "1" at 32050.5,6314 h125
  text "1/1" at 28535.5,6309 h125
DRAWING_ORIGIN:
  lines w1: 11496.5,16120 11546.5,16120 ; 11521.5,16095 11521.5,16145
Mechanical 255:
  lines w1: 14521.5,17626 14521.5,17519 14525.5,17515 14857.5,17515 14861.5,17519 14861.5,17626 14857.5,17630 14525.5,17630 ; 14592.4,17634.2 14596.4,17638.2 ; 12356.5,17305 12356.5,17610 12656.5,17610 12656.5,17305 12356.5,17305 ; 13826.5,17355 13911.5,17355 13911.5,17435 13826.5,17435 13826.5,17355 ; 14564.5,17238 14568.5,17234 14619.5,17234 14623.5,17238 14623.5,17313 14619.5,17317 14568.5,17317 14564.5,17313 14564.5,17238

## Text inside footprints (layer, text, board x,y; h text height)
J5: Top Overlay "8" at 15440.46,17580.89 h30; Top Overlay "1" at 14549.46,17554.89 h30; Bottom Overlay "8" at 15441.46,17629.89 h30; Bottom Overlay "1" at 14596.06,17623.35 h30
J6: Top Overlay "8" at 15440.46,16680.89 h30; Top Overlay "1" at 14549.46,16654.89 h30; Bottom Overlay "8" at 15441.46,16729.89 h30; Bottom Overlay "1" at 14596.06,16723.35 h30
U3: Top Overlay "1" at 13828.35,16554.05 h30 r90; Top Overlay "5" at 13713.35,16367.05 h25 r90; Top Overlay "4" at 13718.35,16554.05 h30 r90; Top Overlay "8" at 13858.35,16404.05 h25 r90
U4: Top Overlay "1" at 14134.95,16554.05 h30 r90; Top Overlay "5" at 14019.95,16367.05 h25 r90; Top Overlay "4" at 14024.95,16554.05 h30 r90; Top Overlay "8" at 14164.95,16404.05 h25 r90
U5: Top Overlay "1" at 13555.7,16554.05 h30 r90; Top Overlay "5" at 13440.7,16367.05 h25 r90; Top Overlay "4" at 13445.7,16554.05 h30 r90; Top Overlay "8" at 13585.7,16404.05 h25 r90
U11: Top Overlay "1" at 14468.11,16554.05 h30 r90; Top Overlay "5" at 14353.11,16367.05 h25 r90; Top Overlay "4" at 14358.11,16554.05 h30 r90; Top Overlay "8" at 14498.11,16404.05 h25 r90
U12: Top Overlay "1" at 14113.29,17642.88 h30 r270; Top Overlay "5" at 14228.29,17829.88 h25 r270; Top Overlay "4" at 14223.29,17642.88 h30 r270; Top Overlay "8" at 14083.29,17792.88 h25 r270
U13: Top Overlay "1" at 14404.17,17637.84 h30 r270; Top Overlay "5" at 14519.17,17824.84 h25 r270; Top Overlay "4" at 14514.17,17637.84 h30 r270; Top Overlay "8" at 14374.17,17787.84 h25 r270
Y2: Bottom Overlay "1" at 13819.97,17686.69 h30